# Altium PCB PCB1.PcbDoc
Units mm, origin at the board's own origin, x right, y up, seen from the top; angles counter-clockwise.
Board outline 99.06 x 99.44 mm, 2 copper layers (Top Layer, Bottom Layer); 26 components, 29 nets, 102 pads, 32 vias.
Unrouted connection lines stored in the file: 1.
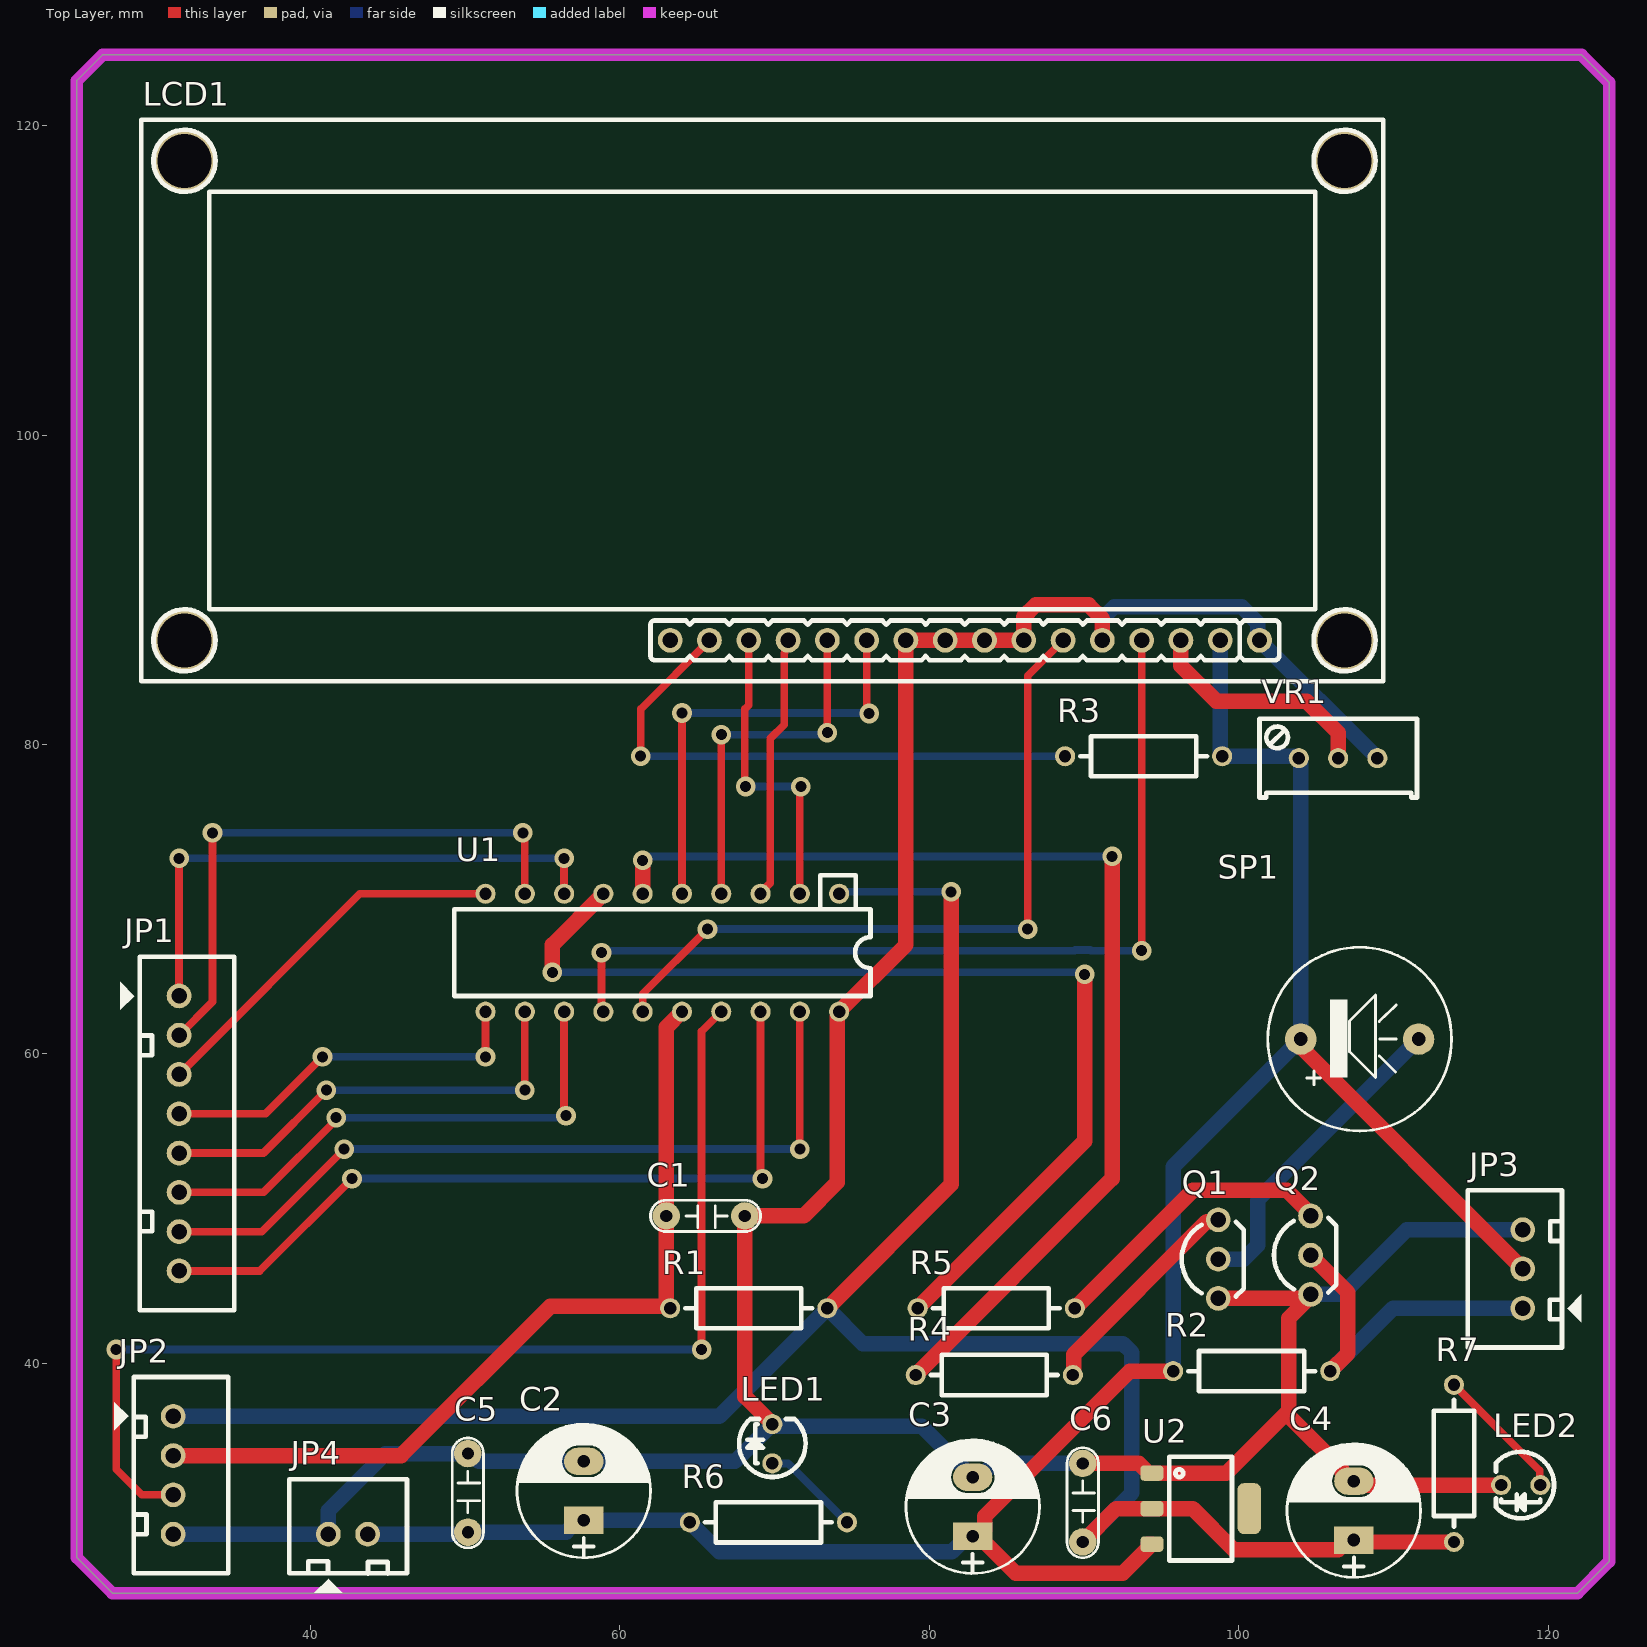
[diagram p0: Top Layer view]
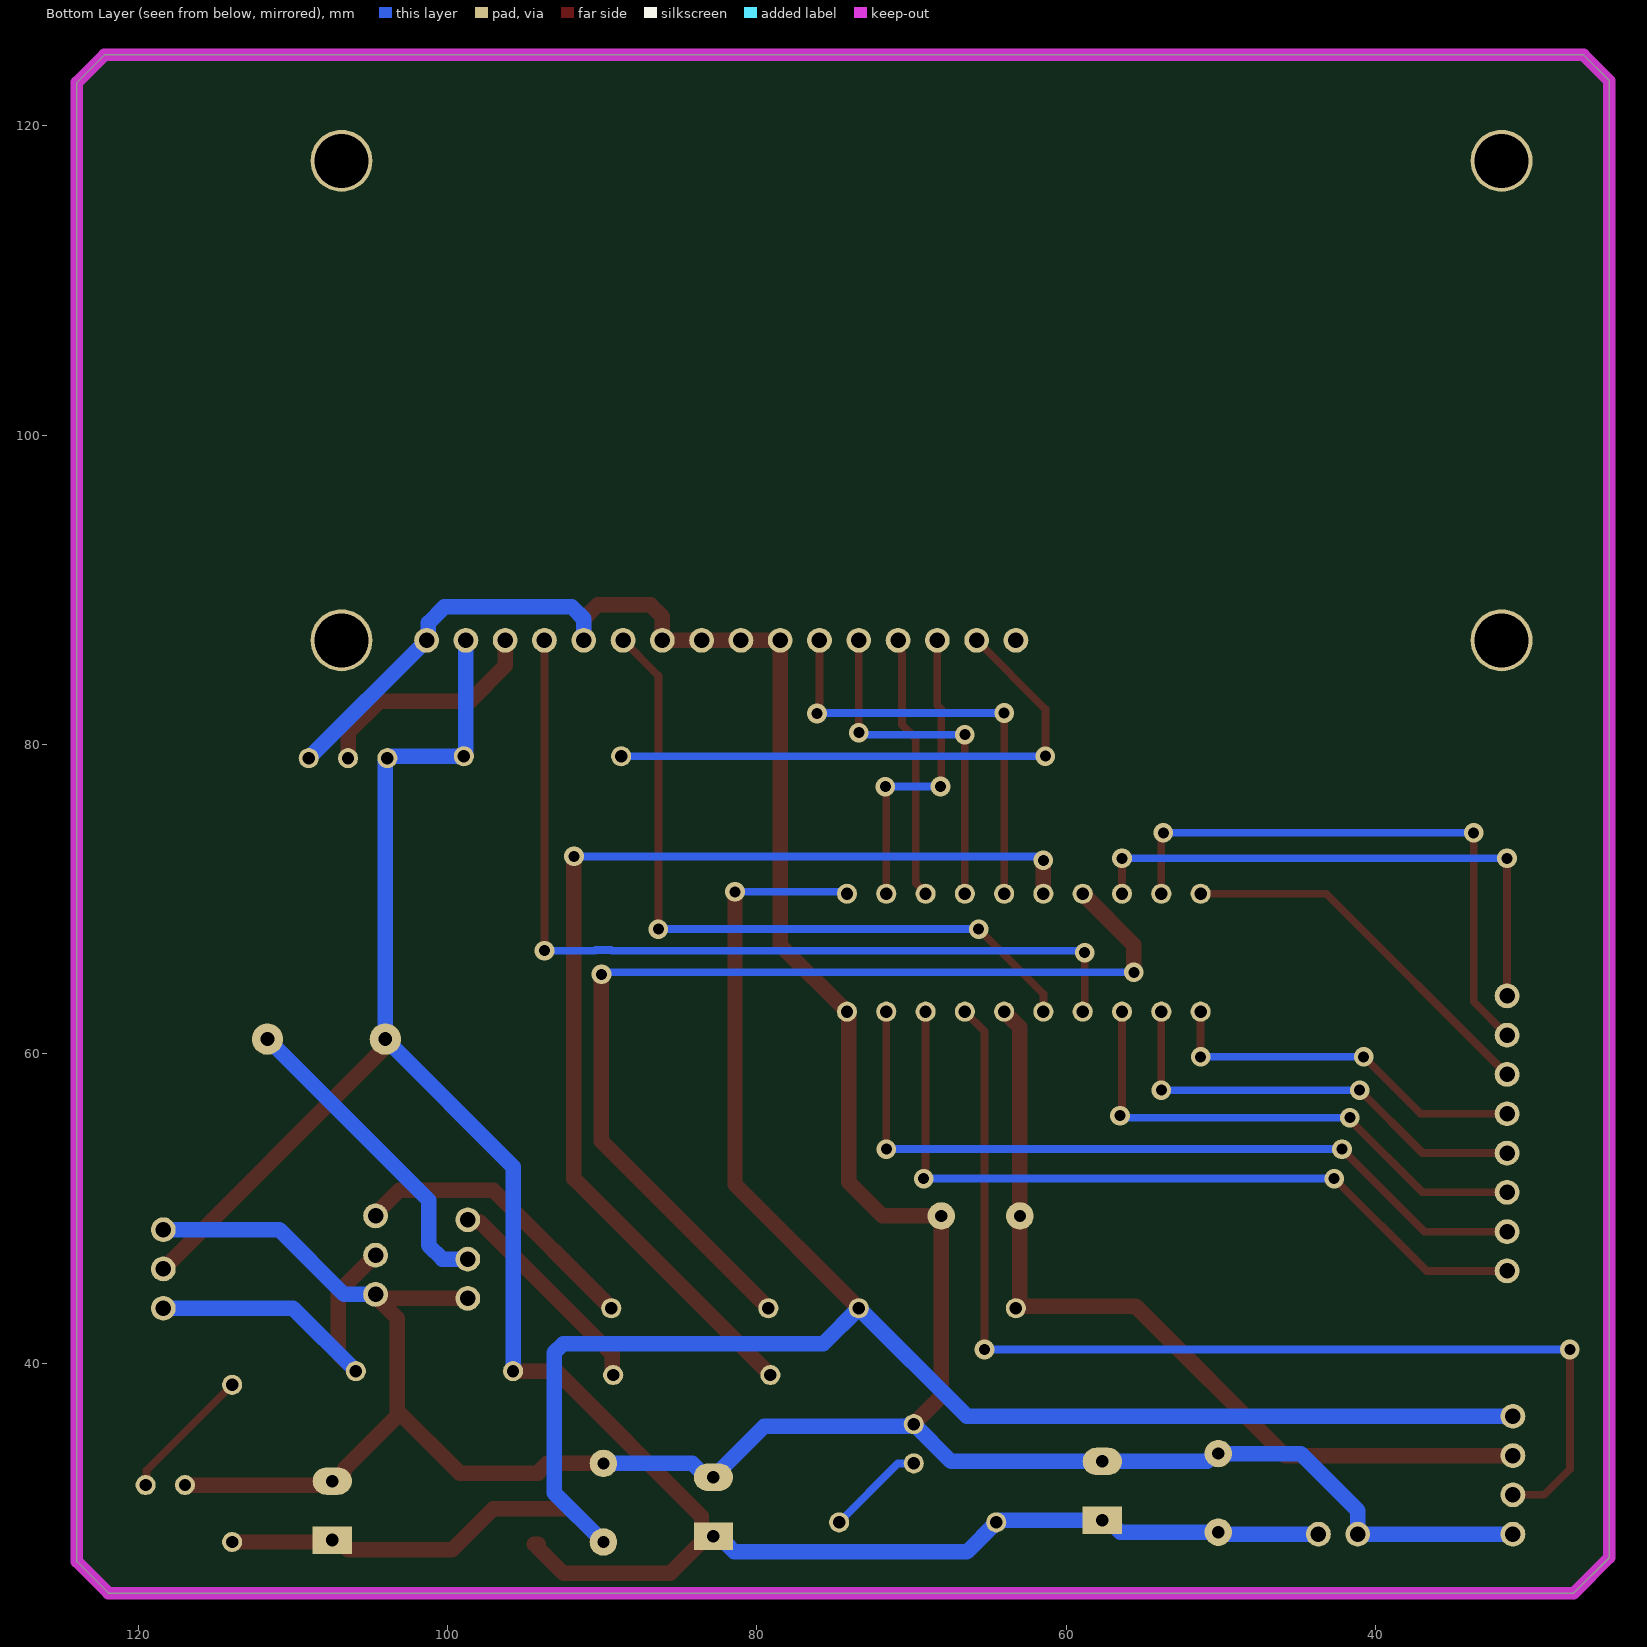
[diagram p1: Bottom Layer view, seen from below]
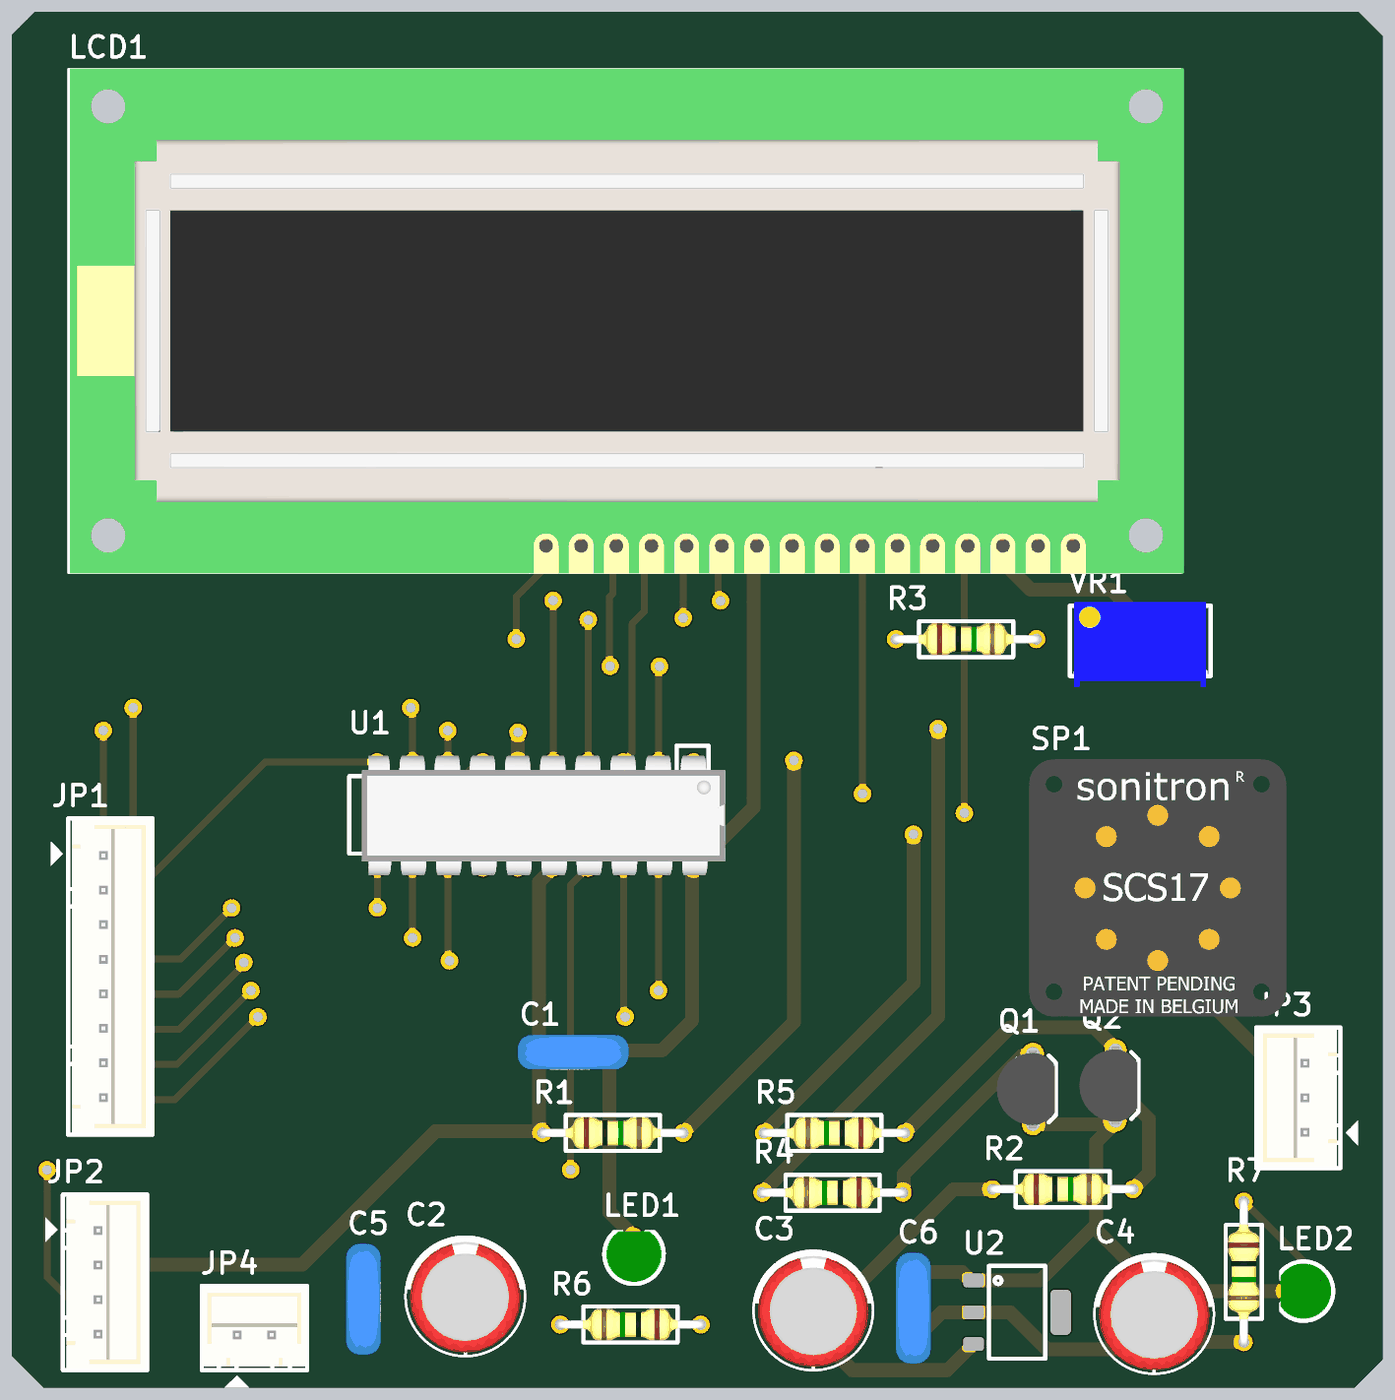
[diagram p2: 3D render of the assembled board from above, using the file's embedded part models]

## Layer stack, top to bottom
Top Solder: solder mask 0.0102, Solder Resist, Dk 3.5
Top Layer: signal copper 0.0356
Dielectric 1: dielectric 0.32, FR-4, Dk 4.8
Bottom Layer: signal copper 0.0356
Bottom Solder: solder mask 0.0102, Solder Resist, Dk 3.5

## Board outline
24.892,27.432 24.892,122.936 26.543,124.587 122.174,124.587 123.952,122.809 123.952,27.178 121.92,25.146 27.178,25.146

## Design rules (kind name [scope] priority, off if disabled: settings)
Clearance [All] p1: gap=0.3 ignorepadtopadclearanceinfootprint=FALSE
PolygonConnect [All] p1: connectstyle=Relief reliefconductorwidth=0.254 reliefentries=4 polygonreliefangle="90 Angle" airgapwidth=0.254
RoutingVias [All] p1: holewidth=0.711 width=1.27 viastyle="Through Hole" minholewidth=0.711 minwidth=1.27 maxholewidth=0.711 maxwidth=1.27
SolderMaskExpansion [All] p1: expansion=0.102 istentingtop=FALSE
Width Width_power [InNetClass('New_Power')] p1: maxlimit=1 minlimit=0.3 preferedwidth=0.5
Width Width_signal [InNetClass('New_Power')] p2: maxlimit=0.5 minlimit=0.2 preferedwidth=0.3
30 further rules are at their usual default settings.

## Classes and differential pairs
net class New_Power: +3V3 +5 GND

## Components (designator, comment, footprint, x,y, rotation, side; value= is the part's Value field where it differs from the comment)
C1 "104" CN2 68.072,49.53 r180 top value=0.1uF
C2 "1000uF/16V" CP1.5/3.4 57.658,29.845 r90 top
C3 "1000uF/16V" CP1.5/3.4 82.804,28.829 r90 top
C4 "1000uF/16V" CP1.5/3.4 107.442,28.575 r90 top
C5 "104" CN2 50.165,34.163 r270 top value=0.1uF
C6 "104" CN2 89.916,33.528 r270 top value=0.1uF
JP1 "JP8" CON8 31.496,54.864 r270 top value="Connector 8"
JP2 "JP4" CON4 31.115,32.766 r270 top value="Connector 4"
JP3 "JP3" CON3 118.364,46.101 r90 top value="Connector 3"
JP4 "JP2" CON2 42.418,28.956 r0 top value="Connector 2"
LCD1 "LCD 16x2A" LCD16x2 101.346,86.741 r180 top value=LCD16x2A
LED1 "LED_G_3" LED3G 69.85,33.528 r90 top value=Green
LED2 "LED_G_3" LED3G 119.507,32.131 r180 top value=Green
Q1 "2SC1815" 2SC1815 98.679,46.736 r90 top
Q2 "2SC1815" 2SC1815 104.648,46.99 r90 top
R1 "CF1/4W2K2J25" "RES 1/4W CFR25" 63.246,43.561 r0 top value="2K2, 1/4W"
R2 "CF1/4W2K2J25" "RES 1/4W CFR25" 95.758,39.497 r0 top value="2K2, 1/4W"
R3 "CF1/4W2K2J25" "RES 1/4W CFR25" 88.773,79.248 r0 top value="2K2, 1/4W"
R4 "CF1/4W2K2J25" "RES 1/4W CFR25" 89.281,39.243 r180 top value="2K2, 1/4W"
R5 "CF1/4W2K2J25" "RES 1/4W CFR25" 89.408,43.561 r180 top value="2K2, 1/4W"
R6 "CF1/4W2K2J25" "RES 1/4W CFR25" 74.676,29.718 r180 top value="2K2, 1/4W"
R7 "CF1/4W2K2J25" "RES 1/4W CFR25" 113.919,38.608 r270 top value="2K2, 1/4W"
SP1 "Speaker" SPK 104.013,60.96 r0 top value="Speaker Chip"
U1 "MSP430G2252IN20" MSP430G2552 74.168,70.358 r180 top
U2 "AMS1117-3V3" AMS1117-3.3V 97.536,30.607 r0 top
VR1 "10K" VR1 103.886,79.121 r0 top value="VR 10K"

## Footprints (in the part's own frame and the unit in brackets; to place one, negate y for a bottom-side part, rotate by r counter-clockwise, add the part's x,y. Pads: shape width x height; smd on the part's side, far side on the other; paste and mask are expansions set on the pad)
2SC1815 [mm] "TO-92 Body Dia. 4.5mm; Leads 0.51 x 0.48 mm (max)"
  round 1.6 hole 1 mask+0.1: 1(-2.54,0) 2(0,0)
  round 1.6 hole 1: 3(2.54,0)
  silkscreen extent -2.41,-1.65 2.41,2.37, body extent -2.79,-1.59 2.79,2.61, height 10
AMS1117-3.3V [mm] "SOT223, 4-Leads, Body 6.7x7.3mm (max), Pitch 2.30mm, IPC Medium Density"
  rrect50% 1.5x1 smd: 1(-3.15,2.3) 2(-3.15,0) 3(-3.15,-2.3)
  rrect50% 1.5x3.28 smd: 4(3.15,0)
  silkscreen extent -2.03,-3.35 2.03,3.35
CN2 [mil]
  round 70 hole 31: 1(0,0) 2(200,0)
  silkscreen extent -40,-40 240,40, body extent -54,-44 260,55, height 407
CON2 [mm] "CON2"
  round 1.6 hole 1 mask+0.1: 1(-1.27,0) 2(1.27,0)
  silkscreen extent -3.81,-3.8 3.81,3.56, body extent -3.75,-2.29 3.75,3.41, height 7
CON3 [mm] "CON 3"
  round 1.6 hole 1 mask+0.1: 1(-2.54,0) 2(0,0) 3(2.54,0)
  silkscreen extent -5.08,-3.8 5.08,3.56, body extent -5,-2.29 5,3.41, height 7
CON4 [mm] "CON4"
  round 1.6 hole 1 mask+0.1: 1(-3.81,0) 2(-1.27,0) 3(1.27,0) 4(3.81,0)
  silkscreen extent -6.35,-3.8 6.35,3.56, body extent -6.25,-2.29 6.25,3.41, height 7
CON8 [mm] "CON8"
  round 1.6 hole 1 mask+0.1: 1(-8.89,0) 2(-6.35,0) 3(-3.81,0) 4(-1.27,0) 5(1.27,0) 6(3.81,0) 7(6.35,0) 8(8.89,0)
  silkscreen extent -11.43,-3.8 11.43,3.56, body extent -11.3,-2.29 11.3,3.41, height 7
CP1.5/3.4 [mil] "Tu hoa 220->470uF,16V, 470uF/16V,25V"
  rect 70x100 hole 32: 1(0,0)
  oval 70x100 hole 32: 2(150,0)
  silkscreen extent -95,-170 245,170, body extent -85,-157 230,157, height 446
LCD16x2 [mm] "LCD 16x2, 36.3mmx80.3mm"
  round 1.6 hole 1 mask+0.1: 1(0,0) 2(2.54,0) 3(5.08,0) 4(7.62,0) 5(10.16,0) 6(12.7,0) 7(15.24,0) 8(17.78,0) 9(20.32,0) 10(22.86,0) 11(25.4,0) 12(27.94,0) 13(30.48,0) 14(33.02,0) 15(35.56,0) 16(38.1,0)
  round 4 hole 3.5: Hole_0(-5.5,0) Hole_1(-5.5,-31) Hole_3(69.5,-31) Hole_4(69.5,0)
  silkscreen extent -8,-33.65 72.3,2.65, body extent -8.25,-33.75 72.25,2.75, height 13.52
LED3G [mm] "LED 3mm_GREEN"
  round 1.3 hole 0.8: 1(0,0) 2(2.54,0)
  silkscreen extent -0.88,-2.15 2.87,2.15, body extent -0.73,-2 2.94,2, height 4.6
MSP430G2552 [mm] "DIP 20, 20 PIN, W 300mil, Pin to pin 100mil"
  round 1.3 hole 0.8: 1(0,0) 2(2.54,0) 3(5.08,0) 4(7.62,0) 5(10.16,0) 6(12.7,0) 7(15.24,0) 8(17.78,0) 9(20.32,0) 10(22.86,0) 11(22.86,7.62) 12(20.32,7.62) 13(17.78,7.62) 14(15.24,7.62) 15(12.7,7.62) 16(10.16,7.62) 17(7.62,7.62) 18(5.08,7.62) 19(2.54,7.62) 20(0,7.62)
  silkscreen extent -2.03,-1.19 24.89,6.61, body extent -2.31,-0.46 24,8.18, height 3.94
"RES 1/4W CFR25" [mm] "Axial Device, Thru-Hole; 2 Leads fi 0.55"
  round 1.3 hole 0.8 mask+0.1: 1(0,0) 2(10.16,0)
  silkscreen extent 0.98,-1.3 9.18,1.3, body extent -0.3,-1.16 10.47,1.16, height 2.93
SPK [mil] "Speaker Chip"
  round 80 hole 35: 1(0,0) 2(300,0)
  silkscreen extent -84,-234 384,234, body extent -221,-354 511,378, height 344
VR1 [mm] "Variable Resistor"
  round 1.3 hole 0.8 mask+0.1: 1(0,0) 2(2.54,0) 3(5.08,0)
  silkscreen extent -2.54,-2.54 7.65,2.54, body extent -2.22,-3.3 7.3,2.79, height 11.56

## Part data
C1 C5 C6: library part CN2, "Cap np 104 => 105pF"
C2 C3 C4: library part CP4, "Cap 1000uF/16V - 220uF/50V", Description 1="2200uF-3300uF/6,3V - 1000uF-2200uF/10V", Description 2="1000uF/16V - 470uF => 1000uF/25V - 100uF/100V", Description 3=330uF>470uF/35V_220uF>470uF/50V_10uF>22uF/250V, Description 4="220uF => 330uF/63V - 10uF =>33uF/160 - 200V", Description 5="4,7uF>10uF/250V_3,3uF>10uF/400V - 2,2uF>4,7uF/450V"
JP1: library part Con8, "Connector 8"
JP2: library part Con4, "Connector 4"
JP3: library part Con3, "Connector 3"
JP4: library part Con2, "Connector 2"
LCD1: library part LCD16x2A, "LCD dipslay 16 char, 2 line"
LED1 LED2: library part LED_GREEN_3MM, "LED Green 3mm", ComponentLink1Description=Datasheet, ComponentLink1URL="D:\Dropbox\Datasheets\Opto and Illumination\LEDs\SMD LED.pdf", Unit Price=0.0476
Q1 Q2: "Trans NPN 50V 150mA TO-92", ComponentLink1Description=Datasheet, ComponentLink1URL="D:\Dropbox\Datasheets\Transistors\P Channel Bipolar\2SC1815.pdf", Unit Price=0.0143
R1 R2 R3 R4 R5 R6 R7: "RES CF AXIAL-0.3 5% 1/4W 2K2", ComponentLink1Description=Datasheet, ComponentLink1URL="D:\Dropbox\Datasheets\Passive Components\Resistors\Carbon Film Resistor.pdf", Unit Price=0.001
SP1: library part SPK, "Speaker Chip"
U1: "MCU 16bit 16KB 1.8-3.6V 16MHz DIP20", ComponentLink1Description=Datasheet, ComponentLink1URL="D:\Dropbox\Datasheets\Microcontrolers\MSP430\MSP430x2xx Family\MSP430G2553.pdf", Unit Price=1.0000
U2: "Linear Voltage Regulator 3.3V 1A 15V Max SOT-223", ComponentLink1Description=Datasheet, ComponentLink1URL="D:\Dropbox\Datasheets\Power Management ICs\Linear Regulators\AMS1117.pdf", Unit Price=0.2000
VR1: library part VR, "Var Resistor"

## Via types
v1: diameter 1.27, hole 0.711, Top Layer to Bottom Layer, 32 vias

## Nets (pads, with @x,y where several pads share a name; then routed paths per layer and width w, separated by ;. In a path a pad name is that pad's centre, name@x,y a point inside that pad or via, vN(x,y) a via of type N, cw(c..) or ccw(c..) an arc to the next point about the centre after c; other vN are vias at no path point)
+3V3: C4.1 C6.2 JP2.1 R1.2 R7.2 U1.1 U2.2 | length 143.5
  Top Layer w1: R1.2 81.407,51.562 v1(81.407,70.485) ; C6.2 92.075,30.607 U2.2 97.028,30.607 99.695,27.94 106.426,27.94 107.061,28.575 C4.1 107.569,28.448 R7.2
  Bottom Layer w0.5: U1.1 74.295,70.485 v1(81.407,70.485)
  Bottom Layer w1: JP2.1 66.421,36.576 R1.2 75.692,41.275 92.505,41.275 93.091,40.689 93.091,31.623 C6.2
+5: C2.1 C3.1 C5.2 JP3.2 JP4.2 LCD1.2 R2.1 R3.2 R6.2 SP1.1 U2.3 VR1.1 | length 148.2
  Top Layer w1: C3.1 C3.1@83.185,28.829 ; U2.3 94.136,28.307 94.136,28.057 92.495,26.416 85.598,26.416 C3.1@83.185,28.829 ; R2.1 92.964,39.497 83.574,30.107 83.574,29.218 C3.1@83.185,28.829 ; SP1.1 104.21,60.763 104.21,60.255 JP3.2
  Bottom Layer w1: JP4.2 50.038,28.956 C5.2 56.515,29.083 57.277,29.845 C2.1 64.308,29.845 64.435,29.718 R6.2 66.421,27.813 81.448,27.813 82.034,28.399 82.034,28.44 82.423,28.829 C3.1 ; R2.1 95.758,52.705 SP1.1 104.013,78.913 103.886,79.04 VR1.1 103.805,79.121 103.678,79.248 R3.2 98.933,79.329 98.806,79.456 LCD1.2
DATA4: LCD1.11 U1.5 | length 28.6
  Top Layer w0.5: U1.5 v1(64.008,82.042) ; LCD1.11 75.946,82.377 76.105,82.219 v1(76.105,82.01)
  Bottom Layer w0.5: v1(64.008,82.042) 76.073,82.042 v1(76.105,82.01)
DATA5: LCD1.12 U1.4 | length 23.2
  Top Layer w0.5: U1.4 v1(66.548,80.645) ; v1(73.406,80.772) LCD1.12
  Bottom Layer w0.5: v1(66.548,80.645) 73.279,80.645 v1(73.406,80.772)
DATA6: LCD1.13 U1.3 | length 17.1
  Top Layer w0.5: U1.3 69.088,70.416 69.723,71.051 69.723,80.391 70.612,81.28 70.612,85.898 70.656,85.942 70.656,86.531 LCD1.13
DATA7: LCD1.14 U1.2 | length 20.1
  Top Layer w0.5: v1(68.125,77.29) 68.072,77.343 68.072,82.296 68.326,82.55 LCD1.14 ; U1.2 71.628,77.216 v1(71.691,77.279)
  Bottom Layer w0.5: v1(68.125,77.29) 71.681,77.29 v1(71.691,77.279)
GND: C1.1 C2.2 C3.2 C4.2 C5.1 C6.1 JP2.4 JP3.3 JP4.1 LCD1.1 LCD1.5 LCD1.7 LCD1.8 LCD1.9 LCD1.10 LCD1.16 LED1.2 LED2.2 Q1.1 Q2.1 U1.20 U2.1 VR1.3 | length 223.3
  Top Layer w1: LED1.2 68.072,37.846 C1.1 71.882,49.53 74.041,51.689 74.041,62.399 74.111,62.468 74.111,62.681 U1.20 78.486,67.056 LCD1.10 LCD1.9 LCD1.8 LCD1.7 86.106,88.265 86.868,89.027 90.297,89.027 91.186,88.138 LCD1.5 ; C6.1 93.55,33.528 94.136,32.942 94.136,32.907 U2.1 99.201,32.907 103.251,36.957 ; Q1.1 104.232,44.196 104.486,44.45 Q2.1 ; Q2.1@104.521,44.196 103.251,42.926 103.251,36.576 106.672,33.155 106.672,32.985 107.272,32.385 C4.2 108.034,32.385 108.288,32.131 LED2.2
  Bottom Layer w1: JP2.4 JP4.1 41.148,30.48 44.831,34.163 C5.1 50.376,34.163 50.884,33.655 67.437,33.655 LED1.2 70.104,36.068 70.231,35.941 79.502,35.941 C3.2@82.274,33.169 ; C3.2@82.634,32.639 C3.2 83.271,32.639 84.16,33.528 C6.1 ; LCD1.5 91.186,88.138 91.948,88.9 100.203,88.9 101.231,87.872 101.231,86.856 LCD1.1 VR1.3 ; Q2.1 106.68,44.45 110.871,48.641 JP3.3
KEY1: JP1.1 U1.8 | length 36.4
  Top Layer w0.5: JP1.1 v1(31.496,72.644) ; U1.8 v1(56.388,72.644)
  Bottom Layer w0.5: v1@31.369,72.898 31.496,72.771 v1(31.496,72.644) v1(56.388,72.644)
KEY2: JP1.2 U1.9 | length 38
  Top Layer w0.5: JP1.2 33.655,63.373 v1(33.655,74.295) ; v1(53.721,74.295) 53.848,74.168 U1.9
  Bottom Layer w0.5: v1(33.655,74.295) v1(53.721,74.295)
KEY3: JP1.3 U1.10 | length 24.7
  Top Layer w0.5: JP1.3 43.18,70.358 U1.10
KEY4: JP1.4 U1.11 | length 24.3
  Top Layer w0.5: JP1.4 37.084,56.134 v1(40.767,59.817) ; v1(51.308,59.817) U1.11
  Bottom Layer w0.5: v1(40.767,59.817) v1(51.308,59.817)
KEY5: JP1.5 U1.12 | length 29.1
  Top Layer w0.5: JP1.5 36.957,53.594 v1(41.021,57.658) ; v1(53.848,57.658) U1.12
  Bottom Layer w0.5: v1(41.021,57.658) v1(53.848,57.658)
KEY6: JP1.6 U1.13 | length 33.9
  Top Layer w0.5: JP1.6 36.957,51.054 41.656,55.753 v1(41.656,55.88) ; U1.13 56.388,56.134 v1(56.515,56.007)
  Bottom Layer w0.5: v1(41.656,55.88) 56.388,55.88 v1(56.515,56.007)
KEY7: JP1.7 U1.19 | length 51.2
  Top Layer w0.5: JP1.7 36.83,48.514 v1(42.164,53.848) ; v1(71.628,53.848) U1.19
  Bottom Layer w0.5: v1(42.164,53.848) v1(71.628,53.848)
KEY8: JP1.8 U1.18 | length 51
  Top Layer w0.5: JP1.8 36.703,45.974 v1(42.672,51.943) ; U1.18 69.088,52.07 v1(69.215,51.943)
  Bottom Layer w0.5: v1(42.672,51.943) v1(69.215,51.943)
LCD_EN: LCD1.6 U1.15 | length 47.4
  Top Layer w0.5: U1.15 61.468,63.881 v1(65.659,68.072) ; v1(86.36,68.072) 86.36,84.455 LCD1.6
  Bottom Layer w0.5: v1(65.659,68.072) v1(86.36,68.072)
LCD_RS: LCD1.4 U1.14 | length 59.2
  Top Layer w0.5: v1(58.801,66.548) 58.801,62.865 U1.14 ; v1(93.726,66.675) LCD1.4
  Bottom Layer w0.5: U1.14@58.801,62.992 58.928,62.865 U1.14 ; v1(58.801,66.548) 58.928,66.675 89.383,66.675 89.425,66.717 90.407,66.717 90.449,66.675 v1(93.726,66.675)
MOTOR: R5.2 U1.7 | length 67
  Top Layer w1: v1(55.626,65.278) 55.626,67.056 U1.7 ; R5.2 90.043,54.356 v1(90.043,65.151)
  Bottom Layer w0.5: v1(55.626,65.278) 89.916,65.278 v1(90.043,65.151)
NetJP3_1: JP3.1 Q2.2 R2.2 | length 23.1
  Top Layer w1: Q2.2 107.061,44.577 107.061,40.64 R2.2
  Bottom Layer w1: R2.2 109.982,43.561 JP3.1
NetLCD1_3: LCD1.3 VR1.2 | length 15.3
  Top Layer w1: LCD1.3 96.266,85.09 98.552,82.804 104.394,82.804 106.426,80.772 VR1.2
NetLCD1_15: LCD1.15 R3.1 | length 36.8
  Top Layer w0.5: v1(61.341,79.248) 61.341,82.296 LCD1.15
  Bottom Layer w0.5: v1(61.341,79.248) R3.1
NetLED1_1: LED1.1 R6.1 | length 6.4
  Bottom Layer w0.5: LED1.1 70.866,33.528 R6.1
NetLED2_1: LED2.1 R7.1 | length 8.8
  Top Layer w0.5: R7.1 119.462,33.065 119.462,32.176 LED2.1
NetQ1_2: Q1.2 SP1.2 | length 20.6
  Bottom Layer w1: Q1.2 100.33,46.736 101.219,47.625 101.219,50.546 SP1.2
NetQ1_3: Q1.3 R4.1 | length 14.3
  Top Layer w1: R4.1 89.338,39.3 89.338,40.57 97.929,49.161 98.564,49.161 Q1.3
NetQ2_3: Q2.3 R5.1 | length 19.2
  Top Layer w1: R5.1 97.028,51.181 103.124,51.181 104.648,49.657 Q2.3
RST: C1.2 JP2.2 R1.1 U1.16 | length 55.9
  Top Layer w1: JP2.2 45.847,34.036 55.499,43.688 62.907,43.688 62.976,43.618 63.189,43.618 R1.1 63.246,43.642 62.992,43.896 C1.2 62.992,61.722 U1.16
SPEAKER: R4.2 U1.6 | length 71.4
  Top Layer w1: U1.6 v1(61.468,72.517) ; R4.2 91.821,51.943 v1(91.821,72.771)
  Bottom Layer w0.5: v1(61.468,72.517) 61.676,72.517 61.93,72.771 v1(91.821,72.771)
TEST: JP2.3 U1.17 | length 72.3
  Top Layer w0.5: v1(27.432,40.894) 27.432,33.147 29.083,31.496 JP2.3 ; v1(65.278,40.894) 65.278,61.468 U1.17
  Bottom Layer w0.5: v1(27.432,40.894) v1(65.278,40.894)
pads on no net: LCD1.Hole_0 LCD1.Hole_1 LCD1.Hole_3 LCD1.Hole_4 U2.4

## Keep-outs
Keep-Out Layer:
  the board outline again, w0.8

## Silkscreen, mask and mechanical layers (free items; w line width, h text height)
Mechanical 1:
  lines w1.2: 25.4,25.4 25.4,127 177.8,127 177.8,25.4 25.4,25.4

## Text inside footprints (layer, text, board x,y; h text height)
JP1: Mechanical 1 "CN?" at 31.546,54.814 h0.8 r270; Mechanical 1 "8" at 30.996,46.264 h1 r270; Mechanical 1 "1" at 31.096,63.864 h1 r270
JP2: Mechanical 2 "1" at 30.615,36.666 h1 r270; Mechanical 2 "4" at 30.615,29.366 h1 r270
JP3: Mechanical 2 "3" at 118.864,48.301 h1 r90; Mechanical 2 "1" at 118.864,43.401 h1 r90
JP4: Mechanical 2 "2" at 43.418,28.456 h1; Mechanical 2 "1" at 41.018,28.456 h1
LCD1: Mechanical 2 "1" at 101.496,87.141 h1.2 r180; Mechanical 2 "16" at 63.796,87.141 h1.2 r180
Q1: Mechanical 1 "E" at 99.06,43.942 h0.8 r90; Mechanical 1 "C" at 99.06,46.482 h0.8 r90; Mechanical 1 "B" at 99.06,49.022 h0.8 r90
Q2: Mechanical 1 "E" at 105.029,44.196 h0.8 r90; Mechanical 1 "C" at 105.029,46.736 h0.8 r90; Mechanical 1 "B" at 105.029,49.276 h0.8 r90
R1: Mechanical 1 "R?" at 63.326,43.561 h0.5
R2: Mechanical 1 "R?" at 95.838,39.497 h0.5
R3: Mechanical 1 "R?" at 88.853,79.248 h0.5
R4: Mechanical 1 "R?" at 89.201,39.243 h0.5 r180
R5: Mechanical 1 "R?" at 89.328,43.561 h0.5 r180
R6: Mechanical 1 "R?" at 74.596,29.718 h0.5 r180
R7: Mechanical 1 "R?" at 113.919,38.528 h0.5 r270
U1: Mechanical 1 "20" at 75.138,65.248 h1.2 r180; Mechanical 1 "11" at 52.038,65.248 h1.2 r180; Mechanical 1 "10" at 52.038,68.948 h1.2 r180; Mechanical 1 "1" at 74.438,69.048 h1.2 r180
U2: Mechanical 1 "3" at 95.961,28.717 h1.2 r270; Mechanical 1 "2" at 95.961,30.922 h1.2 r270; Mechanical 1 "1" at 95.961,33.127 h1.2 r270
VR1: Mechanical 1 "1" at 103.746,78.631 h1; Mechanical 1 "2" at 106.126,78.591 h1; Mechanical 1 "3" at 108.656,78.611 h1